# Altium PCB NRF24L01+PA+LAN.PcbDoc
Units mm, origin at the board's own origin, x right, y up, seen from the top; angles counter-clockwise.
Board outline 25.25 x 12.85 mm, 2 copper layers (Top Layer, Bottom Layer); 34 components, 24 nets, 115 pads, 80 vias.
Unrouted connection lines stored in the file: 99.
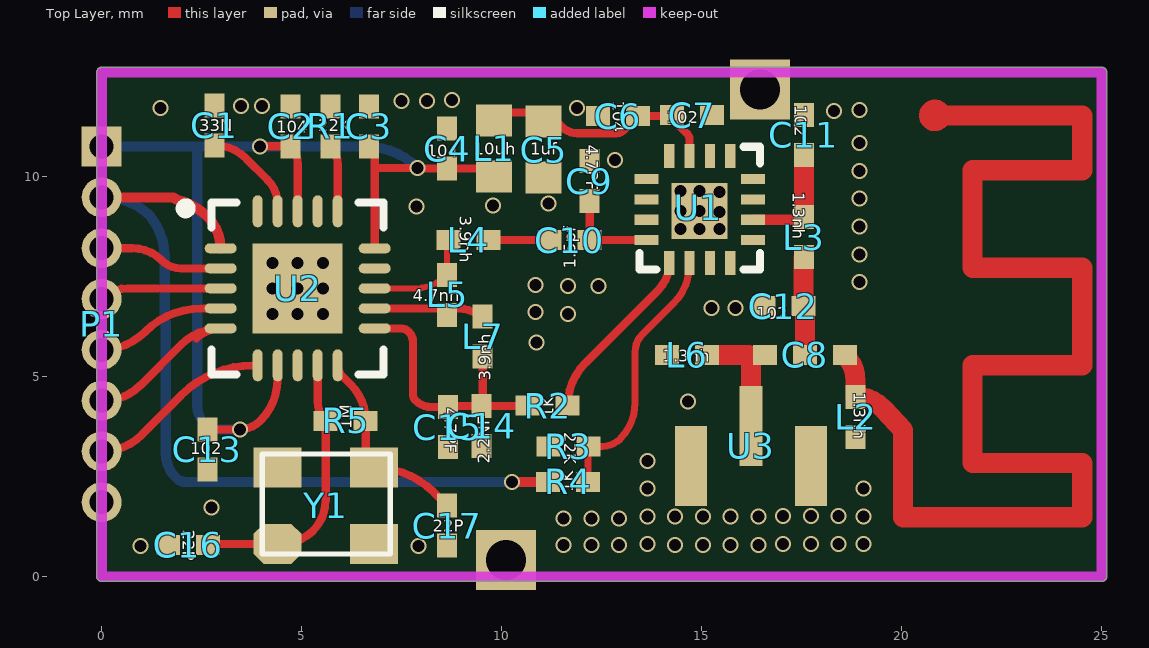
[diagram p0: Top Layer view]
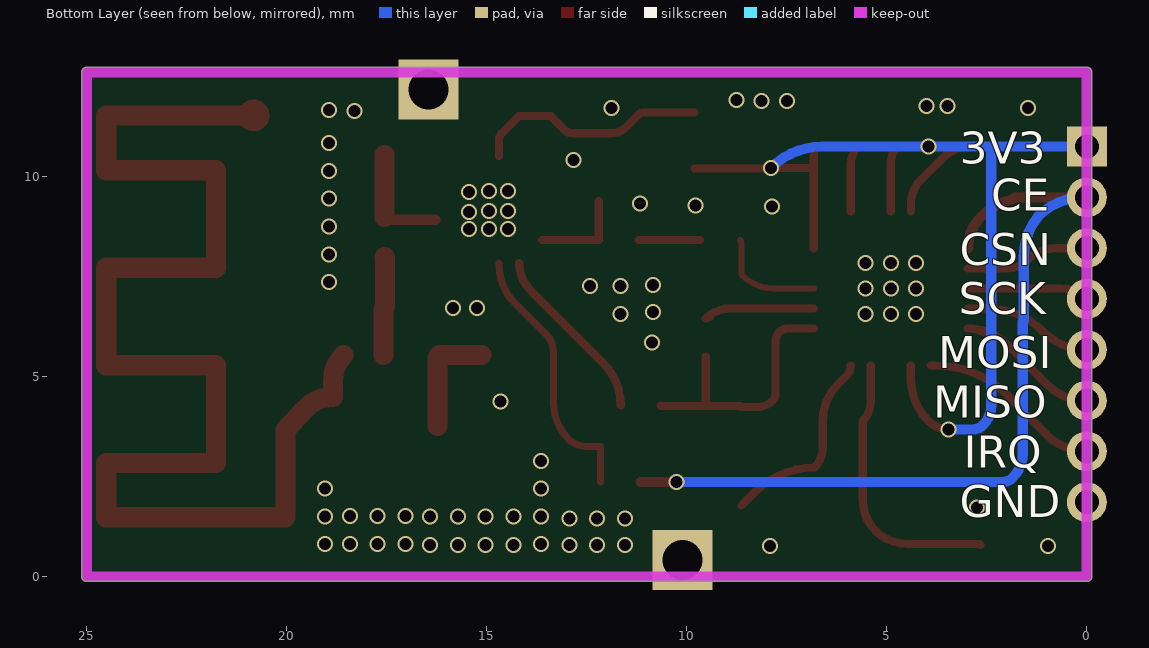
[diagram p1: Bottom Layer view, seen from below]

## Layer stack, top to bottom
Top Solder: solder mask 0.0102, Solder Resist, Dk 3.5
Top Layer: signal copper 0.0356
Dielectric 1: dielectric 0.32, FR-4, Dk 4.8
Bottom Layer: signal copper 0.0356
Bottom Solder: solder mask 0.0102, Solder Resist, Dk 3.5

## Board outline
-0.127,0 ccw(c0,0) 0,-0.127 25,-0.127 ccw(c25,0) 25.127,0 25.127,12.554 ccw(c25,12.554) 25.125,12.577 ccw(c25,12.6) 25.127,12.6 ccw(c25,12.6) 25,12.727 0,12.727 ccw(c0,12.6) -0.127,12.6

## Design rules (kind name [scope] priority, off if disabled: settings)
Clearance [All] p1: gap=0.254 ignorepadtopadclearanceinfootprint=FALSE except(0: Arc-Hole Track-Hole SMDPad-Hole THPad-Hole Via-Hole Fill-Hole Poly-Hole Region-Hole Text-Hole)
PolygonConnect [All] p1: connectstyle=Direct reliefconductorwidth=0.254 reliefentries=4 polygonreliefangle="90 Angle" airgapwidth=0.254
RoomDefinition NRF24L01+PA+LAN [InComponentClass('NRF24L01+PA+LAN')] p1: confinementstyle=ConfineIn formatcopy=TRUE lockcomponents=FALSE outline -67.818,-57.277 -17.018,-57.277 -17.018,-31.877 -67.818,-31.877
RoutingVias [All] p1: holewidth=0.711 width=1.27 viastyle="Through Hole" minholewidth=0.711 minwidth=1.27 maxholewidth=0.711 maxwidth=1.27
SolderMaskExpansion [All] p1: expansion=0.102
Width [All] p1: maxlimit=1 minlimit=0.152 preferedwidth=0.254 toplayer_maxwidth=0.508 bottomlayer_minwidth=0.254 minimp=50.000000 maximp=50.000000 favimp=50.000000
30 further rules are at their usual default settings.

## Classes and differential pairs
component class NRF24L01+PA+LAN: C1 C2 C5 C6 C7 C8 C9 C10 C11 C12 C13 C14 C15 C16 C17 L1 L2 L3 L4 L5 L6 L7 P1 R1 R2 R3 R4 R5 U1 U2 U3 Y1

## Components (designator, comment, footprint, x,y, rotation, side; value= is the part's Value field where it differs from the comment)
C1 "33N" 0402#1 2.819,11.278 r90 top
C2 "104" 0402#1 4.724,11.252 r270 top
C3 "104" 0402#2 6.68,11.252 r90 top
C4 "104" 0402#2 8.636,10.693 r270 top
C5 "1uf" 1608[0603] 11.049,10.668 r270 top
C6 "104" 0402#2 12.903,11.506 r0 top
C7 "102" 0402#2 14.757,11.532 r0 top
C8 "CHOSE" CHOSE 17.577,5.537 r180 top
C9 "4.7PF" 0402#2 12.192,9.881 r270 top
C10 "1.5pf" 0402#2 11.7,8.407 r180 top
C11 "102" 0402#2 17.551,11.038 r90 top
C12 "102" 0402#2 17.043,6.756 r180 top
C13 "102" 0402#2 2.642,3.175 r90 top
C14 "2.2NF" 0402#2 9.5,3.759 r90 top
C15 "4.7PF" 0402#2 8.652,3.734 r90 top
C16 "22P" 0402#2 2.159,0.787 r0 top
C17 "22P" 0402#2 8.636,1.27 r90 top
L1 "10uh" 1608[0603] 9.804,10.693 r90 top
L2 "1.3nh" 0402#2 18.847,3.988 r90 top
L3 "1.3nh" 0402#2 17.551,8.484 r90 top
L4 "3.9nh" 0402#1 9.17,8.407 r0 top
L5 "4.7nh" 0402#2 8.636,7.036 r270 top
L6 "1.3nh" 0402#2 14.63,5.537 r180 top
L7 "3.9nh" 0402#2 9.525,5.994 r270 top
P1 "MHDR1X8" MHDR1X8 0,10.744 r270 top
R1 "22K" 0402#1 5.715,11.252 r90 top
R2 "1K" 0402#2 11.151,4.267 r0 top
R3 "22K" 0402#2 11.667,3.251 r0 top
R4 "1K" 0402#2 11.659,2.362 r0 top
R5 "1M" 0402#2 6.1,3.886 r0 top
U1 "RFX2401C" QFN16 13.469,10.74 r0 top
U2 "NRF24L01" QFN20 4.9,7.2 r0 top
U3 "IPX" IPX 16.231,2.759 r0 top
Y1 "16M" 3225 4.013,0.559 r0 top

## Footprints (in the part's own frame and the unit in brackets; to place one, negate y for a bottom-side part, rotate by r counter-clockwise, add the part's x,y. Pads: shape width x height; smd on the part's side, far side on the other; paste and mask are expansions set on the pad)
0402#1 [mm] "Chip Capacitor, Body 1.0x0.5mm, IPC High Density"
  rect 0.6x0.5 smd: 1(-0.5,0) 2(0.5,0)
  body extent -0.55,-0.3 0.55,0.3, height 1.3
0402#2 [mm]
  rect 0.6x0.5 smd: 1(0.5,0) 2(-0.5,0)
  body extent -0.55,-0.3 0.55,0.3, height 1.3
1608[0603] [mm] "Chip Capacitor, Body 1.6x0.8mm, IPC High Density"
  rect 0.8x0.9 smd: 1(-0.7,0) 2(0.7,0)
  body extent -0.87,-0.48 0.87,0.48, height 1.3
3225 [mm]
  oct 1.2x1 smd: 1(0.381,0.254)
  rect 1.2x1 smd: 2(2.794,2.159) 3(0.381,2.159) 4(2.794,0.254)
  silkscreen extent 0,0 3.2,2.5
CHOSE [mm]
  rect 0.6x0.5 smd: 1(0,0) 2(0.991,0) 3(-1,0)
IPX [mm]
  rect 0.58x2 smd: 1(0,1)
  rect 0.8x2 smd: 2(-1.5,0) 2(1.5,0)
MHDR1X8 [mm] "Connector; Header; 8 Position"
  rect 1x1 hole 0.6: 1(0,0)
  round 1 hole 0.6: 2(1.27,0) 3(2.54,0) 4(3.81,0) 5(5.08,0) 6(6.35,0) 7(7.62,0) 8(8.89,0)
QFN16 [mm]
  round 0.6 on Top Overlay: 0(0.075,-0.15)
  rect 0.6x0.254 smd: 1(0.146,-0.809) 2(0.146,-1.317) 3(0.146,-1.825) 4(0.146,-2.333) 9(2.813,-2.333) 10(2.813,-1.825) 11(2.813,-1.317) 12(2.813,-0.809)
  rect 1.4x1.4 smd: 3(1.475,-1.6)
  rect 0.254x0.6 smd: 5(0.719,-2.902) 6(1.227,-2.902) 7(1.735,-2.902) 8(2.243,-2.902) 13(2.243,-0.235) 14(1.735,-0.235) 15(1.227,-0.235) 16(0.719,-0.235)
  silkscreen extent -0.02,-3.07 2.99,0
QFN20 [mm] "QFN, 20-Leads, Body 4.00x4.00mm, Pitch 0.50mm, Thermal Pad 2.25x2.25mm, IPC Medium Density"
  oval 0.8x0.25 smd: 1(-1.925,1) 2(-1.925,0.5) 3(-1.925,0) 4(-1.925,-0.5) 5(-1.925,-1) 11(1.925,-1) 12(1.925,-0.5) 13(1.925,0) 14(1.925,0.5) 15(1.925,1)
  oval 0.25x0.8 smd: 6(-1,-1.925) 7(-0.5,-1.925) 8(0,-1.925) 9(0.5,-1.925) 10(1,-1.925) 16(1,1.925) 17(0.5,1.925) 18(0,1.925) 19(-0.5,1.925) 20(-1,1.925)
  rect 2.25x2.25 smd: 20(0,0)
  silkscreen extent -2.92,-2.15 2.15,2.15

## Part data
C1 C2 C3 C4 C5 C6 C7 C9 C10 C11 C12 C13 C14 C15 C16 C17: library part Cap, "Capacitor", LatestRevisionDate=17-Jul-2002, LatestRevisionNote="Re-released for DXP Platform.", PackageDescription="Radial Cap, Thru-Hole; 2 Leads; 0.3 in Pin Spacing", PackageReference=RAD-0.3, Published=8-Jun-2000, Publisher="Altium Limited"
L1 L2 L3 L4 L5 L6 L7: library part Inductor, "Inductor", Code_IEC=1005, Code_JEITA=0402, LatestRevisionDate=29-May-2009, LatestRevisionNote="IPC-7351 Footprint Added.", PackageDescription="Chip Inductor", PackageReference=0402-A, Published=8-Jun-2000, Publisher="Altium Limited"
P1: "Header, 8-Pin", LatestRevisionDate=17-Jul-2002, LatestRevisionNote="Re-released for DXP Platform.", Publisher="Altium Limited"
R1 R2 R3 R4 R5: library part Res2, "Resistor", LatestRevisionDate=17-Jul-2002, LatestRevisionNote="Re-released for DXP Platform.", PackageDescription="Axial Device, Thru-Hole; 2 Leads; 0.4 in Pin Spacing", PackageReference=AXIAL-0.4, Published=8-Jun-2000, Publisher="Altium Limited"
Y1: library part XTAL, "Crystal Oscillator", LatestRevisionDate=17-Jul-2002, LatestRevisionNote="Re-released for DXP Platform.", PackageDescription="Crystal, Thru-Hole; 2 Leads; Body 3.1 x 8.2 mm (Dia.xH)", PackageReference=R38, Published=8-Jun-2000, Publisher="Altium Limited"

## Free pads (board coordinates)
  rect 1.5x1.5 hole 1: 2(10.109,0.406) 2(16.459,12.167)

## Via types
v1: diameter 0.4, hole 0.3, Top Layer to Bottom Layer, 80 vias

## Nets (pads, with @x,y where several pads share a name; then routed paths per layer and width w, separated by ;. In a path a pad name is that pad's centre, name@x,y a point inside that pad or via, vN(x,y) a via of type N, cw(c..) or ccw(c..) an arc to the next point about the centre after c; other vN are vias at no path point)
CE: P1.2 R4.2 U2.1 | length 21
  Top Layer w0.254: P1.2 1.743,9.474 cw(c1.743,9.317) 1.854,9.428 cw(c1.463,7.794) 2.651,8.982 cw(c1.869,8.2) U2.1 ; v1(10.262,2.362) R4.2
  Bottom Layer w0.254: P1.2 0.078,9.474 cw(c0.078,7.862) 1.056,9.144 cw(c0.078,7.862) 1.219,9.002 cw(c-0.073,7.979) 1.575,7.979 1.575,6.401 cw(c1.513,6.339) 1.6,6.339 1.6,3.077 ccw(c2.467,3.077) 1.854,2.464 ccw(c2.099,2.709) 2.099,2.362 v1(10.262,2.362)
CSN: P1.3 U2.2 | length 3.1
  Top Layer w0.203: P1.3 0.763,8.204 cw(c0.763,7.164) 1.499,7.899 ccw(c1.98,8.381) 1.98,7.7 U2.2
GND: C1.2 C2.1 C3.1 C4.2 C5.2 C6.2 C7.1 C9.2 C11.1 C12.1 C13.2 C14.2 C15.2 C16.2 C17.2 L2.2 L6.1 P1.8 pad.2 R1.2 R3.2 U1.1 U1.2 U1.3 U1.7 U1.8 U1.9 U1.11 U1.12 U1.14 U1.16 U2.8 U2.14 U2.17 U2.20 U3.2 Y1.3 Y1.4
  other v1: 0.965,0.762 7.925,0.762 11.549,0.787 12.243,0.787 12.937,0.787 14.334,0.787 15.028,0.787 15.723,0.787 16.417,0.787 13.64,0.804 17.035,0.813 17.729,0.813 18.423,0.813 19.05,0.804 11.549,1.448 12.243,1.448 12.937,1.448 13.64,1.499 14.334,1.499 15.028,1.499 15.723,1.499 16.417,1.499 17.035,1.507 17.729,1.507 18.423,1.507 19.05,1.499 2.743,1.727 13.64,2.193 19.05,2.193 13.64,2.887 14.656,4.369 10.871,5.842 4.265,6.565 4.9,6.565 5.535,6.565 11.659,6.553 10.846,6.604 15.24,6.706 15.85,6.706 4.265,7.2 4.9,7.2 5.535,7.2 11.659,7.264 12.421,7.264 10.846,7.29 18.948,7.358 4.265,7.835 4.9,7.835 5.535,7.835 18.948,8.052 14.469,8.69 14.944,8.69 15.444,8.69 18.948,8.746 15.444,9.115 14.469,9.14 14.944,9.14 7.874,9.246 9.779,9.271 11.176,9.322 18.948,9.44 15.444,9.615 14.469,9.64 14.944,9.64 18.948,10.135 12.827,10.414 18.948,10.829 18.313,11.633 18.948,11.659 1.473,11.709 11.887,11.709 3.48,11.76 4.013,11.76 7.493,11.887 8.128,11.887 8.763,11.913
IRQ: P1.7 U2.6 | length 4.6
  Top Layer w0.203: P1.7 ccw(c0,4.535) 0.997,3.537 1.991,4.531 cw(c3.787,2.735) 3.787,5.275 U2.6
MISO: P1.6 U2.5 | length 4.3
  Top Layer w0.203: P1.6 0.045,4.394 ccw(c0.045,5.695) 0.965,4.775 1.976,5.786 cw(c2.975,4.788) U2.5 ccw(c2.975,5.34) 2.367,5.948
MOSI: P1.5 U2.4 | length 3.3
  Top Layer w0.203: P1.5 ccw(c0,7.197) 1.084,6.113 cw(c2.501,4.697) 2.501,6.7 U2.4
NetC1_1: C1.1 U2.19 | length 2.5
  Top Layer w0.2: C1.1 cw(c2.819,9.658) 3.611,10.45 4.14,9.92 cw(c3.513,9.293) 4.355,9.573 cw(c3.513,9.293) 4.4,9.293 U2.19
NetC5_1: C5.1 C6.1 C7.2 L1.2 U1.15 | length 5.9
  Top Layer w0.203: L1.2@9.804,11.597 10.992,11.597 cw(c10.992,10.458) 11.162,11.584 11.513,11.233 ccw(c11.889,11.609) 11.889,11.077 12.858,11.077 ccw(c12.858,11.357) 13.056,11.159 C6.1 14.196,11.506 14.639,11.064 cw(c14.501,10.926) 14.696,10.926 cw(c14.212,10.91) 14.696,10.91 U1.15
NetC8_1: C8.1 C12.2 L3.2 | length 2.5
  Top Layer w0.5: L3.2 17.543,7.976 C12.2 cw(c17.463,6.676) 17.577,6.676 C8.1
NetC8_2: C8.2 L6.2 U3.1 | length 2.8
  Top Layer w0.5: L6.2 16.18,5.537 cw(c16.057,5.415) 16.231,5.415 U3.1
NetC8_3: C8.3 L2.1 | length 35
  Top Layer w0.381: 21.033,11.523 ccw(c20.828,11.523) 21.033,11.523
  Top Layer w0.5: C8.3 cw(c17.925,4.885) 18.847,4.885 L2.1 cw(c18.847,3.539) 19.518,4.21 19.557,4.17
  Top Layer w0.508: 19.557,4.17 20.034,3.656 20.034,1.476 24.514,1.476 24.514,2.836 21.774,2.836 ; 21.033,11.523 24.488,11.523 ; 21.77,2.848 21.77,5.272 ; 21.77,7.725 21.77,10.149 ; 21.774,5.275 24.514,5.275 ; 21.774,7.713 24.514,7.713 ; 21.774,10.151 24.514,10.151 ; 24.514,5.286 24.514,7.711 ; 24.514,10.163 24.514,11.523
NetC9_1: C9.1 C10.2 U1.4 | length 2.4
  Top Layer w0.203: C9.1 12.2,9.373 C10.2 U1.4
NetC10_1: C10.1 L4.2 | length 1.5
  Top Layer w0.203: L4.2 C10.1
NetC11_2: C11.2 L3.1 U1.10 | length 2.8
  Top Layer w0.254: U1.10 17.387,8.915 ccw(c17.387,9.148) L3.1
  Top Layer w0.5: L3.1 C11.2
NetC14_1: C14.1 C15.1 L7.1 R2.2 U2.11 | length 6.7
  Top Layer w0.203: U2.11 7.468,6.2 cw(c7.468,5.901) 7.679,6.113 cw(c7.432,5.865) 7.782,5.865 7.782,4.555 ccw(c8.009,4.555) 7.849,4.394 ccw(c8.236,4.781) 8.236,4.234 C15.1 ; C15.1@8.652,4.259 C14.1 ; L7.1 9.525,4.321 cw(c9.438,4.321) C14.1 ; R2.2 10.643,4.259 C14.1
NetC16_1: C16.1 R5.2 U2.9 Y1.1 | length 7
  Top Layer w0.203: C16.1 cw(c2.72,0.726) 2.72,0.813 Y1.1 4.486,0.813 ccw(c4.486,1.94) 5.283,1.143 ccw(c4.518,1.908) 5.6,1.908 R5.2 cw(c6.083,4.369) 5.4,4.369 U2.9
NetC17_1: C17.1 R5.1 U2.10 Y1.2 | length 5
  Top Layer w0.203: U2.10 ccw(c6.266,5.275) 6.007,5.017 6.22,4.804 cw(c5.303,3.886) R5.1 6.6,3.218 ccw(c7.307,3.218) Y1.2 cw(c6.807,0.591) 8.311,2.095 C17.1
NetL4_1: L4.1 L5.2 U2.13 | length 2.8
  Top Layer w0.152: U2.13 7.825,7.2 ccw(c7.825,8.346) L5.2 8.636,8.325 cw(c8.752,8.325) L4.1
NetL5_1: L5.1 L7.2 U2.12 | length 2.9
  Top Layer w0.203: U2.12 8.906,6.7 cw(c8.906,5.825) 9.525,6.444 ccw(c9.428,6.346) L7.2@9.428,6.484
NetR1_1: R1.1 U2.16 | length 1.7
  Top Layer w0.203: R1.1 cw(c5.268,10.306) 5.9,10.306 U2.16
NetR2_1: R2.1 U1.5 | length 4.5
  Top Layer w0.203: R2.1 cw(c13.164,4.267) 12.094,5.338 13.919,7.163 ccw(c13.271,7.811) 14.188,7.811 U1.5
NetR3_1: R3.1 R4.1 U1.6 | length 6.7
  Top Layer w0.178: R4.1 12.159,3.243 R3.1 12.525,3.251 ccw(c12.525,3.858) 12.954,3.429 ccw(c12.034,4.349) 13.335,4.349 13.335,5.613 cw(c13.948,5.613) 13.515,6.047 14.3,6.833 ccw(c13.345,7.788) 14.696,7.788 U1.6
SCK: P1.4 U2.3 | length 3
  Top Layer w0.203: P1.4 cw(c0.642,6.292) 0.642,7.2 U2.3
VDD: C2.2 C3.2 C4.1 C13.1 L1.1 P1.1 U2.7 U2.15 U2.18 | length 28
  Top Layer w0.203: C13.1 v1(3.453,3.675) ccw(c3.453,4.396) 3.962,3.886 ccw(c2.906,4.943) 4.4,4.943 U2.7 ; v1@3.968,10.75 3.97,10.752 C2.2 cw(c4.3,10.328) 4.9,10.328 U2.18 ; C3.2@6.731,10.752 cw(c6.504,10.525) 6.825,10.525 6.825,10.211 ; U2.15 6.825,10.211 ; C4.1 9.801,10.193 9.804,10.197 7.934,10.197 cw(c7.934,10.245) v1(7.899,10.211) 6.825,10.211
  Bottom Layer w0.254: P1.1 2.413,10.744 ; v1(3.453,3.675) 2.855,3.675 cw(c2.855,4.049) 2.591,3.785 cw(c3.081,4.275) 2.388,4.275 2.388,10.683 cw(c2.474,10.683) 2.413,10.744 ; v1(7.899,10.211) ccw(c6.612,8.923) 6.612,10.744 v1(3.962,10.744) 2.413,10.744
pads on no net: U1.0 U1.13

## Keep-outs
Keep-Out Layer:
  lines w0.254: 25,12.554 25,0 0,0 0,12.6 25,12.6

## Silkscreen, mask and mechanical layers (free items; w line width, h text height)
Bottom Overlay:
  text "3V3" at 3.175,10.312 h0.8
  text "CE" at 2.388,9.144 h0.8
  text "CSN" at 3.175,7.772 h0.8
  text "SCK" at 3.2,6.553 h0.8
  text "MOSI" at 3.708,5.207 h0.8
  text "MISO" at 3.835,3.962 h0.8
  text "IRQ" at 3.073,2.718 h0.8
  text "GND" at 3.175,1.473 h0.8